# EAGLE board source_eagle (EAGLE 9.6.2)
REV: A
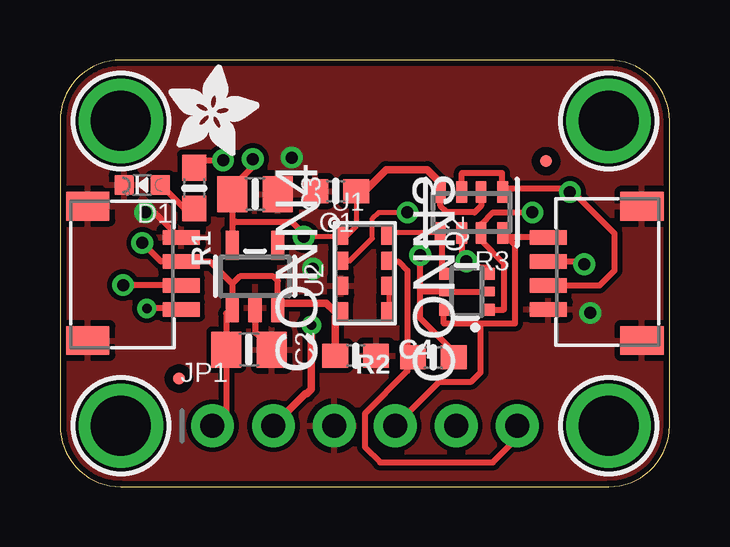
[diagram p0: board, top side]
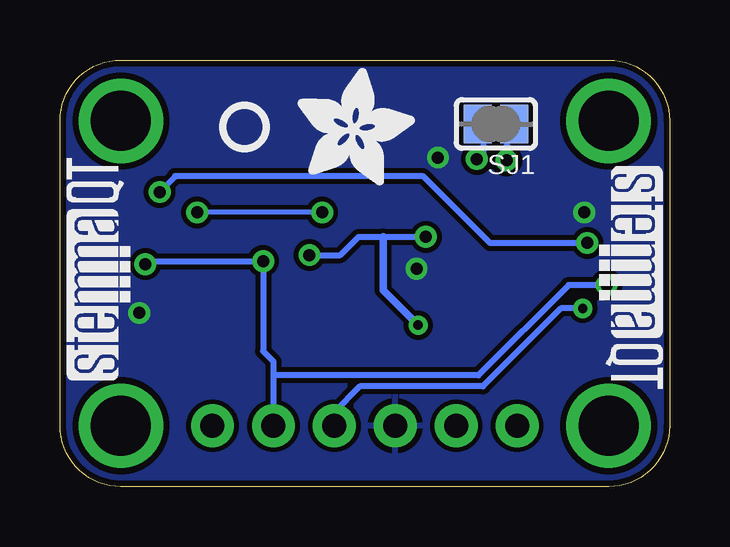
[diagram p1: board, bottom side, seen from below]

Size 25.4 x 17.78 mm. Coordinates in mm from the lower left corner, seen from the top.
Outline: 0,15.24 0,2.54 arc90 2.54,0 22.86,0 arc90 25.4,2.54 25.4,15.24 arc90 22.86,17.78 2.54,17.78 arc90 0,15.24
Copper layers (1*16): Top 0.035mm / dielectric 1.5mm / Bottom 0.035mm
Design rules "adafruit *": minimum track width 8mil, minimum drill 15.5mil, track to track 8mil, track to pad 8mil, pad to pad 8mil, via to via 8mil, smd to smd 8mil, copper to edge 10mil, drill to drill 8mil, minimum pad ring 10mil, minimum via ring 8mil, stop-mask expansion 2mil, vias tented up to drill 20mil, thermal gap 10mil

## Footprints (pad centres in the part's own frame; a part is rotated, then mirrored left to right if it is on the bottom)
0603-NO = smd 1.075 x 1: 1 -0.85,0; 2 0.85,0
0805-NO = smd 1.24 x 1.5: 1 -0.95,0; 2 0.95,0
JST_SH4 = smd 0.6 x 1.55: 1 -1.5,2.006; 2 -0.5,2.006; 3 0.5,2.006; 4 1.5,2.006 | smd 1.2 x 1.8: MT1 -2.8,-1.894; MT2 2.8,-1.894
CHIPLED_0603_NOOUTLINE = smd 0.8 x 0.8: A 0,-0.75; C 0,0.75
FIDUCIAL_0.5MM = smd 0.5 x 0.5: 1 0,0
1X06_ROUND_70 = drill 1 pad 1.778: 1 -6.35,0; 2 -3.81,0; 3 -1.27,0; 4 1.27,0; 5 3.81,0; 6 6.35,0
SOT363 = smd 0.5 x 0.5: 1 -0.75,-0.9; 3 0.75,-0.9; 4 0.75,0.9; 6 -0.75,0.9 | smd 0.4 x 0.5: 2 0,-0.9; 5 0,0.9
RESPACK_4X0603 = smd 0.45 x 0.9: 1 -1.3,-0.85; 2 -0.4,-0.85; 3 0.4,-0.85; 4 1.3,-0.85; 5 1.3,0.85; 6 0.4,0.85; 7 -0.4,0.85; 8 -1.3,0.85
SOLDERJUMPER_CLOSEDWIRE = smd 1.168 x 1.6: 1 -0.762,0; 2 0.762,0 | smd 0.635 x 0.203: WIRE 0,0
VISHAY_VCNL4030X01 = smd 0.65 x 0.75: 1 -1.005,1.575; 2 -1.005,0.525; 3 -1.005,-0.525; 4 -1.005,-1.575; 5 1.005,-1.575; 6 1.005,-0.525; 7 1.005,0.525; 8 1.005,1.575
SOT23-5 = smd 0.55 x 1.2: 1 -0.95,-1.3; 2 0,-1.3; 3 0.95,-1.3; 4 0.95,1.3; 5 -0.95,1.3
MOUNTINGHOLE_2.5_PLATED = drill 2.5 pad 3.2: P$1 0,0

## Placement (x,y rotation side)
C1  0.1uF  [0603-NO]  11.49,12.32 180 top
C2  10uF  [0805-NO]  7.87,5.71 0 top
C3  10uF  [0805-NO]  8.13,12.19 0 top
C4  0.1uF  [0603-NO]  12.32,5.46 0 top
CONN3  STEMMA_I2C_QT  [JST_SH4]  22.35,8.89 90 top
CONN4  STEMMA_I2C_QT  [JST_SH4]  3.05,8.89 270 top
D1  GREEN  [CHIPLED_0603_NOOUTLINE]  3.43,12.57 90 top
FID3  FIDUCIAL_0.5MM  [FIDUCIAL_0.5MM]  4.95,4.51 0 top
FID4  FIDUCIAL_0.5MM  [FIDUCIAL_0.5MM]  20.26,13.56 0 top
JP1  [1X06_ROUND_70]  12.7,2.54 0 top
PLABEL0  [PLABEL0]  6.35,0.89 0 top
PLABEL1  [PLABEL1]  8.89,4.19 0 top
PLABEL2  [PLABEL2]  11.43,0.89 0 top
PLABEL3  [PLABEL3]  13.97,4.19 0 top
PLABEL4  [PLABEL4]  16.64,0.89 0 top
PLABEL5  [PLABEL5]  19.3,4.19 0 top
PLABEL8  [PLABEL8]  0.25,12.45 0 top
PLABEL10  [PLABEL10]  12.7,7.62 0 bottom
PLABEL11  [PLABEL11]  12.57,4.57 0 bottom
PLABEL12  [PLABEL12]  7.11,16.89 0 bottom
PLABEL13  [PLABEL13]  12.7,1.02 0 bottom
PLABEL14  [PLABEL14]  14.29,16.51 0 top
PLABEL15  [PLABEL15]  14.35,14.61 0 top
PLABEL16  [PLABEL16]  12.7,11.43 0 bottom
Q2  BSS138  [SOT363]  16.95,8.13 90 top
R1  10K  [0603-NO]  5.59,12.45 270 top
R2  10K  [0603-NO]  15.56,5.4 180 top
R3  4.7K Pack  [RESPACK_4X0603]  17.14,11.43 180 top
SJ1  [SOLDERJUMPER_CLOSEDWIRE]  7.24,15.11 180 bottom
U1  VCNL4030X01  [VISHAY_VCNL4030X01]  12.7,8.89 0 top
U2  AP2127K-3.3  [SOT23-5]  8.13,8.76 0 top
U$1  MOUNTINGHOLE2.5  [MOUNTINGHOLE_2.5_PLATED]  2.54,15.24 0 top
U$9  [ADAFRUIT_5MM]  15.49,12.57 0 bottom
U$17  MOUNTINGHOLE2.5  [MOUNTINGHOLE_2.5_PLATED]  22.86,15.24 0 top
U$19  MOUNTINGHOLE2.5  [MOUNTINGHOLE_2.5_PLATED]  2.54,2.54 0 top
U$21  MOUNTINGHOLE2.5  [MOUNTINGHOLE_2.5_PLATED]  22.86,2.54 0 top
U$22  [ADAFRUIT_3.5MM]  4.51,13.78 0 top
U$25  [PCBFEAT-REV-040]  17.72,14.99 0 bottom
U$30  [STEMMAQT]  22.48,4.45 90 bottom
U$31  [STEMMAQT]  2.92,13.34 270 bottom

## Library data of the parts
C1-C4 FID3 FID4 JP1 R1-R3 SJ1 U$9 U$22 U$25 = microbuilder
CONN3 CONN4 = adafruit_electromech; LCSC: C2845363
D1 = microbuilder; ROT: 270
PLABEL0 PLABEL1-PLABEL5 PLABEL8 PLABEL10-PLABEL16 = pinguin
Q2 = microbuilder; JLC_ROTATION: 270
U1 = adafruit_sensor; DESCRIPTION: VCNL4030X01 Fully Integrated Proximity and Ambient Light Sensor with IR Emitter, I2C, 2.5-3.6V; MF: Vishay; MP: VCNL4030X01-GS08; PACKAGE: QFN-8 4.0x2.36mm; ROT: 270
U2 = adafruit_power; JLC_ROTATION: 270
U$1 U$17 U$19 U$21 = adafruit_electromech; BOM: EXCLUDE
U$30 U$31 = silks

## Nets
3.3V: C1.1 C3.1 JP1.2 Q2.2 Q2.5 R2.1 R3.2 R3.4 SJ1.2 U1.1 U2.5
GND: C1.2 C2.2 C3.2 C4.2 CONN3.1 CONN3.MT1 CONN3.MT2 CONN4.1 CONN4.MT1 CONN4.MT2 D1.C JP1.3 U1.3 U2.2
INT: JP1.6 R2.2 U1.7
N$1: D1.A R1.2
N$2: R1.1 SJ1.1
N$3: U1.5 U1.6
SCL: CONN3.4 CONN4.4 JP1.4 Q2.6 R3.8
SCL_3V: Q2.1 R3.7 U1.2
SDA: CONN3.3 CONN4.3 JP1.5 Q2.3 R3.6
SDA_3V: Q2.4 R3.5 U1.8
VCC: C2.1 C4.1 CONN3.2 CONN4.2 JP1.1 R3.1 R3.3 U1.4 U2.1 U2.3

## Tracks (layer width: path | path; a pad name or v marks a point on that pad's centre or on a via)
3.3V  (via drill 0.39, 0.5)
  Top 0.203: v10.16,10.41 11.64,10.41 U1.1 11.95,10.46 12.34,10.86 C1.1
  Top 0.254: Q2.2 Q2.5 15.01,8.13 | R3.2 17.55,11.7 17.27,11.43 16.13,11.43 15.85,11.71 R3.4 | 7.18,10.92 C3.1 7.18,12.48 8.03,13.34 v8.03,13.65 | 7.18,10.92 U2.5 | 7.18,10.92 7.3,11.05 9.65,11.05 10.16,10.54 v10.16,10.41 | 15.01,8.13 v15.01,9.65 | R2.1 16.41,5.63 15.01,7.03 15.01,8.13
  Top 0.305: C1.1 12.7,12.32 13.59,13.21 15.3,13.21 15.85,12.67 R3.4 | JP1.2 10.22,3.87 10.29,3.87 10.48,4.06 v10.48,6.73
  Bottom 0.254: v15.01,9.65 13.72,9.65 12.95,10.41 11.94,10.41 v10.16,10.41 | SJ1.2 7.77,14.88 7.77,13.91 v8.03,13.65
  Bottom 0.305: v10.48,6.73 11.94,8.19 11.94,10.41
GND  (via drill 0.5)
  Top 0.254: U2.2 8.13,6.41 C2.2 | CONN4.1 4.98,10.39 3.94,11.43 v3.56,11.43
  other vias: 22.1,7.24 9.65,13.72 10.54,9.08
  pour Top: 0,17.78 25.4,17.78 25.4,0 0,0
  pour Bottom: 0,17.78 25.4,17.78 25.4,0 0,0
INT
  Top 0.203: U1.7 14.08,9.41 14.13,9.37 | R2.2 14.54,5.4 14.48,5.46
  Top 0.254: JP1.6 19.05,2.03 18.03,1.02 13.34,1.02 12.7,1.65 12.7,3.05 14.48,4.83 14.48,5.46 14.48,9.02 14.13,9.37
N$1
  Top 0.254: D1.A 5.17,11.6 R1.2
N$2  (via drill 0.5)
  Top 0.254: R1.1 5.89,13.6 v6.79,13.6
  Bottom 0.254: SJ1.1 6.79,14.8 v6.79,13.6
N$3
  Top 0.203: U1.6 U1.5
SCL  (via drill 0.39)
  Top 0.203: 17.53,6.73 17.46,6.79
  Top 0.254: CONN3.4 18.64,10.39 R3.8 18.95,10.07 18.95,6.79 17.46,6.79 15.99,6.79 15.99,7.31 Q2.6 | 17.53,6.73 17.53,4.76 17.14,4.38 15.81,4.38 JP1.4 | CONN4.4 5.01,7.43 v3.62,7.43
  Bottom 0.254: v3.62,7.43 4.53,7.43 7.78,4.18 12.9,4.18 13.97,3.11 JP1.4
SCL_3V  (via drill 0.5)
  Top 0.203: U1.2 12.08,9.41 13.02,10.35 13.02,11.18 13.27,11.43 v14.48,11.43
  Top 0.254: v19.68,11.43 18.03,11.43 17.55,10.94 R3.7 17.55,10.27 18.5,9.32 18.5,7.38 Q2.1
  Bottom 0.203: v14.48,11.43 v19.68,11.43
SDA  (via drill 0.5)
  Top 0.254: R3.6 16.75,9.69 16.94,9.5 v16.94,9.4 16.94,9.13 17.86,9.13 Q2.3 | CONN4.3 2.64,8.39 v2.63,8.4 | CONN3.3 21.73,9.39 v21.84,9.27
  Bottom 0.254: v2.63,8.4 4.2,8.4 7.97,4.64 16.51,4.64 | v21.84,9.27 21.72,9.4 v16.94,9.4 16.94,5.65 16.51,5.23 16.51,4.64 | 16.51,4.64 JP1.5
SDA_3V
  Top 0.203: U1.8 13.83,10.59 15.83,10.59 R3.5
  Top 0.254: Q2.4 15.91,9.02 15.91,10.52 R3.5
VCC  (via drill 0.5)
  Top 0.254: R3.3 16.75,13.06 16.76,13.08 18.41,13.08 18.41,12.31 R3.1 18.57,12.41 21.12,12.41 v21.25,12.28 21.38,12.28 23.11,10.54 23.11,9.02 22.49,8.39 CONN3.2 | U2.3 9.08,8.57 8.89,8.76 7.49,8.76 7.18,8.45 | 7.18,8.45 U2.1 6.92,7.21 C2.1 6.92,3.11 JP1.1 | 7.18,8.45 6.24,9.39 CONN4.2 4.2,9.39 v3.43,10.16
  Top 0.305: U2.3 9.08,7.65 11.1,7.65 11.44,7.32 U1.4 11.47,7.09 C4.1
  Bottom 0.254: v21.25,12.28 20.61,12.91 20.61,12.95 10.29,12.95 7.49,10.16 v3.43,10.16

## Text on the board
Pinguin_tBackup: VCNL4030 | Prox & Light
Pinguin_bBackup: VCNL4030